# Altium PCB tunnelAmp.PcbDoc
Units mil, origin at the board's own origin, x right, y up, seen from the top; angles counter-clockwise.
Board outline 812.01 x 599.61 mil, 2 copper layers (Top, Bottom); 8 components, 6 nets, 27 pads, 6 vias.
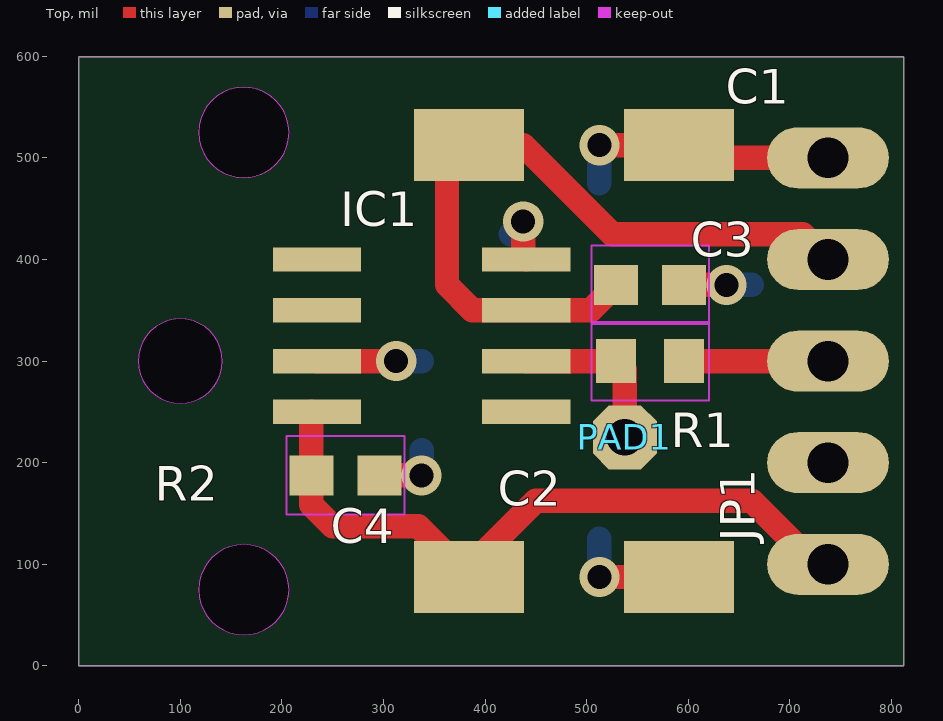
[diagram p0: Top view]
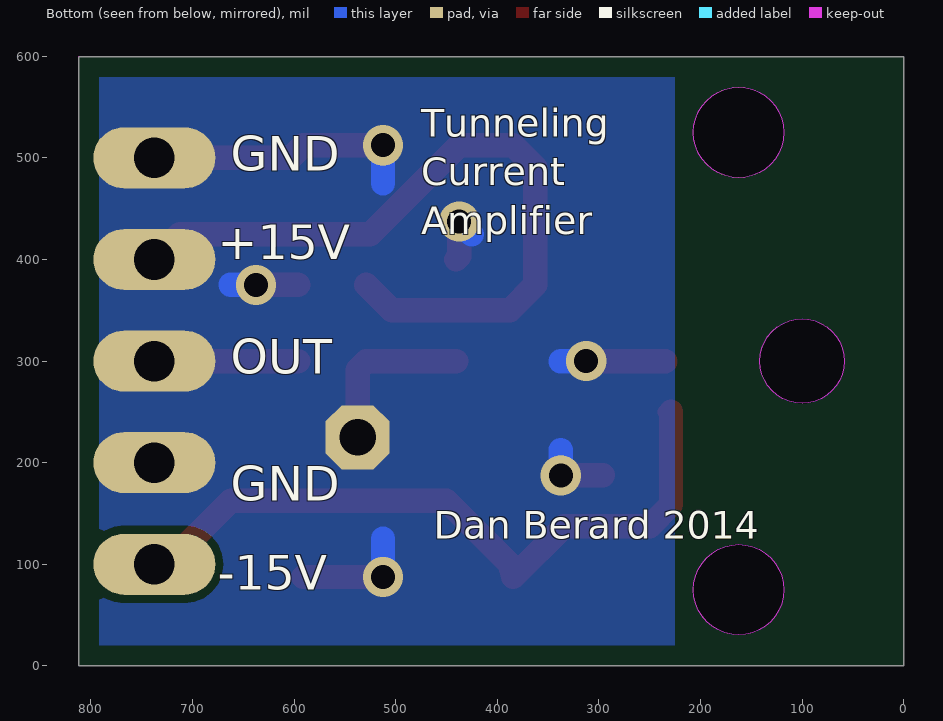
[diagram p1: Bottom view, seen from below]

## Layer stack, top to bottom
Top Solder: solder mask 0.4, Solder Resist, Dk 3.5
Top: signal copper 1.378
Dielectric 1: dielectric 12.6, FR-4, Dk 4.8
Bottom: signal copper 1.378
Bottom Solder: solder mask 0.4, Solder Resist, Dk 3.5

## Board outline
0,0 812.01,0 812.01,599.61 0,599.61
cut-out: 162.5,480.5 ccw(c162.5,525) 207,525 ccw(c162.5,525) 162.5,569.5 ccw(c162.5,525) 118,525 ccw(c162.5,525)
cut-out: 162.5,30.5 ccw(c162.5,75) 207,75 ccw(c162.5,75) 162.5,119.5 ccw(c162.5,75) 118,75 ccw(c162.5,75)
cut-out: 100,258.5 ccw(c100,300) 141.5,300 ccw(c100,300) 100,341.5 ccw(c100,300) 58.5,300 ccw(c100,300)

## Design rules (kind name [scope] priority, off if disabled: settings)
BoardOutlineClearance mdCopperDimension [All] p1: gap=10 ignorepadtopadclearanceinfootprint=FALSE except(0: Arc-SplitContinuation Track-SplitContinuation SMDPad-SplitContinuation THPad-SplitContinuation Via-SplitContinuation Fill-SplitContinuation Poly-SplitContinuation Region-SplitContinuation Text-SplitContinuation; 20: Poly-OutlineEdge Poly-CavityEdge Poly-CutoutEdge Poly-SplitBarrior)
Clearance "Clearance (Same Net)" [All] p1: gap=8 ignorepadtopadclearanceinfootprint=FALSE
Clearance [All] p2: gap=8 ignorepadtopadclearanceinfootprint=FALSE
HoleSize [All] p1: absolutevalues=TRUE maxlimit=100000 minlimit=24 maxpercent=80.000 minpercent=20.000
HoleToHoleClearance mdDrill [All] p1: gap=8 allowstackedmicrovias=TRUE
MinimumSolderMaskSliver [All] p1 off: minsoldermaskwidth=10
PasteMaskExpansion mlMinCreamFrame [All] p1: expansion=0
PolygonConnect PolygonConnect_For_PolygonThermal_ON_Width100000_Gap100000 [InPolygonClass('PolygonThermal_ON_Width100000_Gap100000') vs Not IsVia] p1: connectstyle=Relief reliefconductorwidth=10 reliefentries=4 polygonreliefangle="90 Angle" airgapwidth=10
PolygonConnect PolygonConnect_For_PolygonThermal_ON_Width240000_Gap100000 [InPolygonClass('PolygonThermal_ON_Width240000_Gap100000') vs Not IsVia] p2: connectstyle=Relief reliefconductorwidth=24 reliefentries=4 polygonreliefangle="90 Angle" airgapwidth=10
PolygonConnect ThermalVias [IsVia] p3: connectstyle=Direct reliefconductorwidth=10 reliefentries=4 polygonreliefangle="90 Angle" airgapwidth=10
PolygonConnect [All] p4: connectstyle=Relief reliefconductorwidth=10 reliefentries=4 polygonreliefangle="90 Angle" airgapwidth=10
RoutingVias [All] p1: holewidth=24 width=40 viastyle="Through Hole" minholewidth=24 minwidth=40 maxholewidth=100 maxwidth=100
SolderMaskExpansion mlMinStopFrame [All] p1: expansion=4 istentingtop=FALSE
Width [All] p1: maxlimit=10 minlimit=10 preferedwidth=10
26 further rules are at their usual default settings.

## Classes and differential pairs
polygon class PolygonThermal_ON_Width240000_Gap100000: Polygon_1_Net_GND

## Components (designator, comment, footprint, x,y, rotation, side; value= is the part's Value field where it differs from the comment)
C1 "" C/6032-28W 487.5,512.5 r180 top
C2 "" C/6032-28W 487.5,87.5 r180 top
C3 "" C0603 562.5,375 r0 top
C4 "" C0603 262.5,187.5 r0 top
IC1 "" SO08 337.5,325 r270 top
JP1 "" 1X05 737.5,300 r270 top
PAD1 "" 1,6/0,9 537.5,225 r0 top
R1 "" R0603 562.5,300 r0 top

## Footprints (in the part's own frame and the unit in brackets; to place one, negate y for a bottom-side part, rotate by r counter-clockwise, add the part's x,y. Pads: shape width x height; smd on the part's side, far side on the other; paste and mask are expansions set on the pad)
1,6/0,9 [mil] "1,6/0,9"
  oct 63x63 / inner round 58.2 / far side oct 63x63 hole 36: 1(0,0)
1X05 [mil] "1X05"
  oval 60x120 hole 40: 1(-200,0) 2(-100,0) 3(0,0) 4(100,0) 5(200,0)
C0603 [mm] "C0603"
  rect 1.1x1 smd: 1(-0.85,0) 2(0.85,0)
  Top keep-out lines w0.051: -1.473,-0.983 -1.473,0.983 1.473,0.983 1.473,-0.983 -1.473,-0.983
C/6032-28W [mil] "C/6032-28W"
  rect 108.27x70.87 smd: +(103.35,0) -(-103.35,0)
R0603 [mm] "R0603"
  rect 1x1.1 smd: 1(-0.85,0) 2(0.85,0)
  Top keep-out lines w0.051: -1.473,-0.983 -1.473,0.983 1.473,0.983 1.473,-0.983 -1.473,-0.983
SO08 [mil] "SO08"
  rect 24x87 smd: 1(-75,-103) 2(-25,-103) 3(25,-103) 4(75,-103) 5(75,103) 6(25,103) 7(-25,103) 8(-75,103)

## Part data
C1 C2: library part C/6032-28W, PackageName=C/6032-28W
C3 C4: library part C0603, PackageName=C0603
IC1: library part SO08, PackageName=SO08
JP1: library part 1X05, PackageName=1X05
PAD1: library part 1,6/0,9, PackageName=1,6/0,9
R1: library part R0603, PackageName=R0603

## Free pads (board coordinates)
  round 83 hole 83 unplated: MH1(100,300)
  round 89 hole 89 unplated: MH2(162.5,75) MH3(162.5,525)

## Via types
v1: diameter 39.62/39.62 (per signal layer), hole 23.62, Top to Bottom, 6 vias

## Nets (pads, with @x,y where several pads share a name; then routed paths per layer and width w, separated by ;. In a path a pad name is that pad's centre, name@x,y a point inside that pad or via, vN(x,y) a via of type N, cw(c..) or ccw(c..) an arc to the next point about the centre after c; other vN are vias at no path point)
+9V: C1.+ C3.1 IC1.7 JP1.2 | length 733.7
  Top w24: C3.1 504.04,350 IC1.7 387.5,350 362.5,375 362.5,490.85 C1.+ 437.5,512.5 525,425 712.5,425 JP1.2
-9V: C2.+ C4.1 IC1.4 JP1.5 | length 696.2
  Top w16: IC1.4@229.04,250 IC1.4
  Top w24: IC1.4@229.04,250 C4.1 229.04,158.46 250,137.5 334.15,137.5 C2.+ 387.5,100 450,162.5 662.5,162.5 725,100 JP1.5
GND: C1.- C2.- C3.2 C4.2 IC1.3 IC1.8 JP1.1 JP1.4 | length 688.5
  Top w24: IC1.3 v1(312.5,300) ; C4.2 v1(337.5,187.5) ; v1(437.5,437.5) 437.5,403 IC1.8 ; v1(512.5,87.5) C2.- ; v1(512.5,512.5) C1.- 603.35,500 JP1.1@750,500 ; C3.2 v1(637.5,375)
  Bottom w24: v1(312.5,300) 337.5,300 ; v1(337.5,187.5) 337.5,212.5 ; v1@425,425 v1(437.5,437.5) ; v1(512.5,87.5) 512.5,125 ; 512.5,475 v1(512.5,512.5) ; v1(637.5,375) 662.5,375
N$1: IC1.6 PAD1.1 R1.1 | length 167
  Top w24: IC1.6 R1.1 537.5,291.54 PAD1.1
N$2: JP1.3 R1.2 | length 141.5
  Top w24: R1.2 JP1.3
N$4: IC1.2
pads on no net: IC1.1 IC1.5

## Polygon pours and split planes (outlines as drawn)
GND on Bottom "Polygon_1_Net_GND" (solid, remove dead copper, pour order 1): 225.5,612 824.5,612 824.5,-12 225.5,-12
no net on Top Solder "Polygon_1_NoNet" (solid, pour order 0): 20,300 ccw(c100,300) 100,220 ccw(c100,300) 180,300 ccw(c100,300) 100,380 ccw(c100,300)

## Keep-outs
Keep-Out Layer:
  the board outline again, w0

## Silkscreen, mask and mechanical layers (free items; w line width, h text height)
Top Overlay:
  text "R2" at 75,162.5 h34
Bottom Overlay:
  text "Tunneling" at 475,521 h27.2
  text "GND" at 662.5,487.5 h34
  text "Current" at 475,473 h27.2
  text "Amplifier" at 475,425 h27.2
  text "+15V" at 675,400 h34
  text "OUT" at 662.5,287.5 h34
  text "GND" at 662.5,162.5 h34
  text "Dan Berard 2014" at 462.5,125 h27.2
  text "-15V" at 675,75 h34
Dimension:
  the board outline again, w0